# Altium PCB ARMBoard.PcbDoc
Units mm, origin at the board's own origin, x right, y up, seen from the top; angles counter-clockwise.
Board outline 70 x 50 mm, 2 copper layers (Top Layer, Bottom Layer), stack 0.571 mm thick; 64 components, 53 nets, 236 pads, 287 vias.
Unrouted connection lines stored in the file: 41.
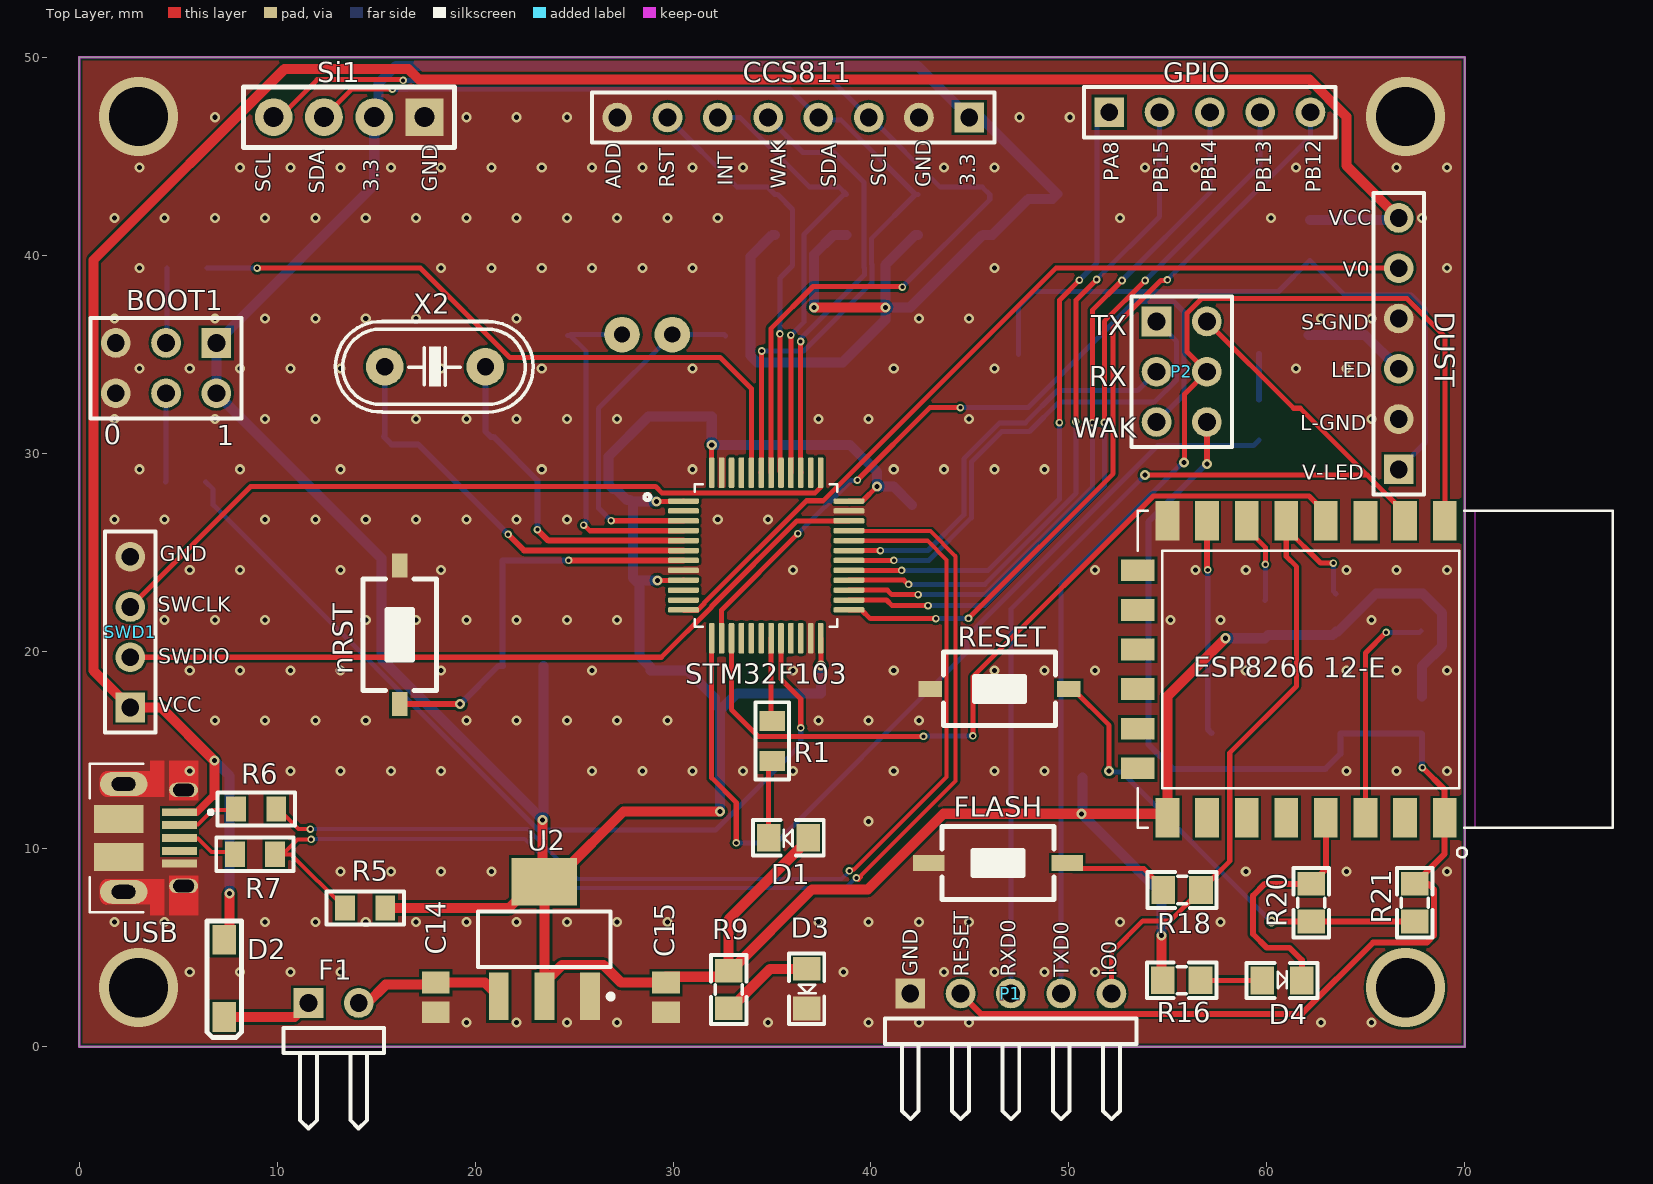
[diagram p0: Top Layer view]
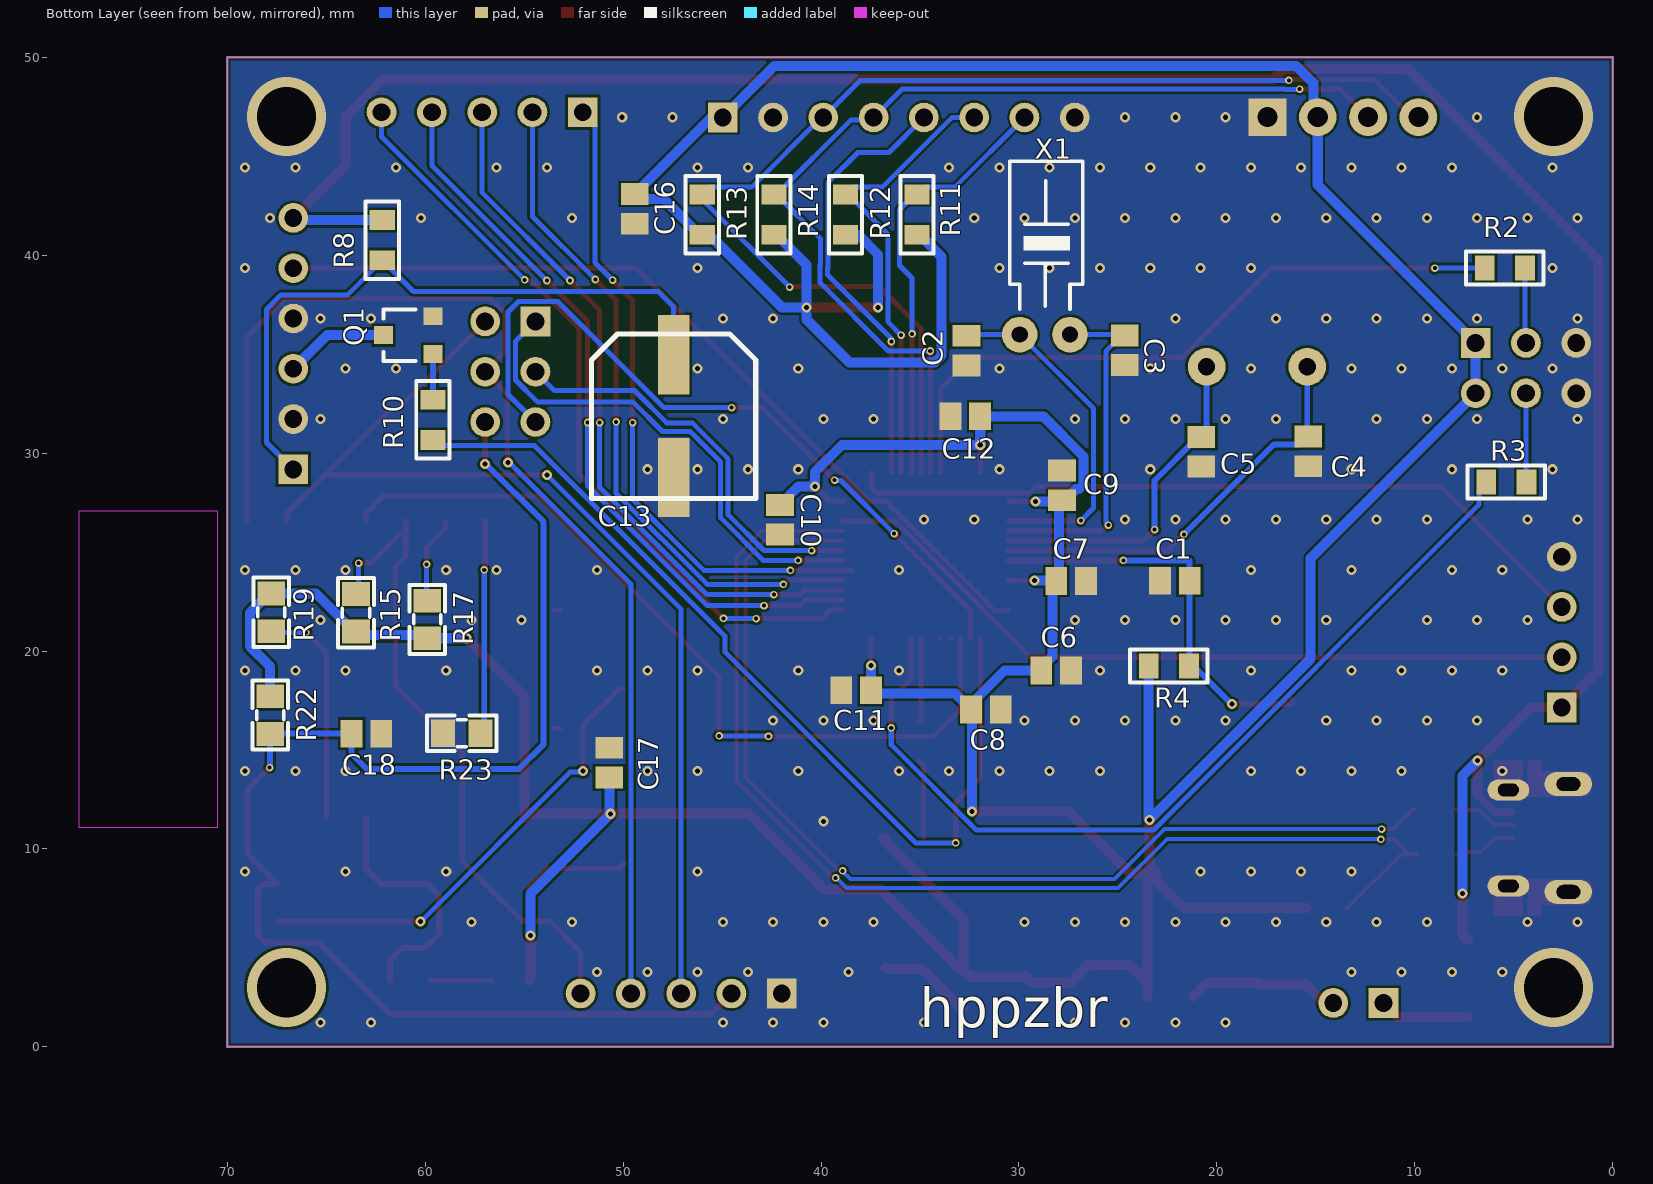
[diagram p1: Bottom Layer view, seen from below]
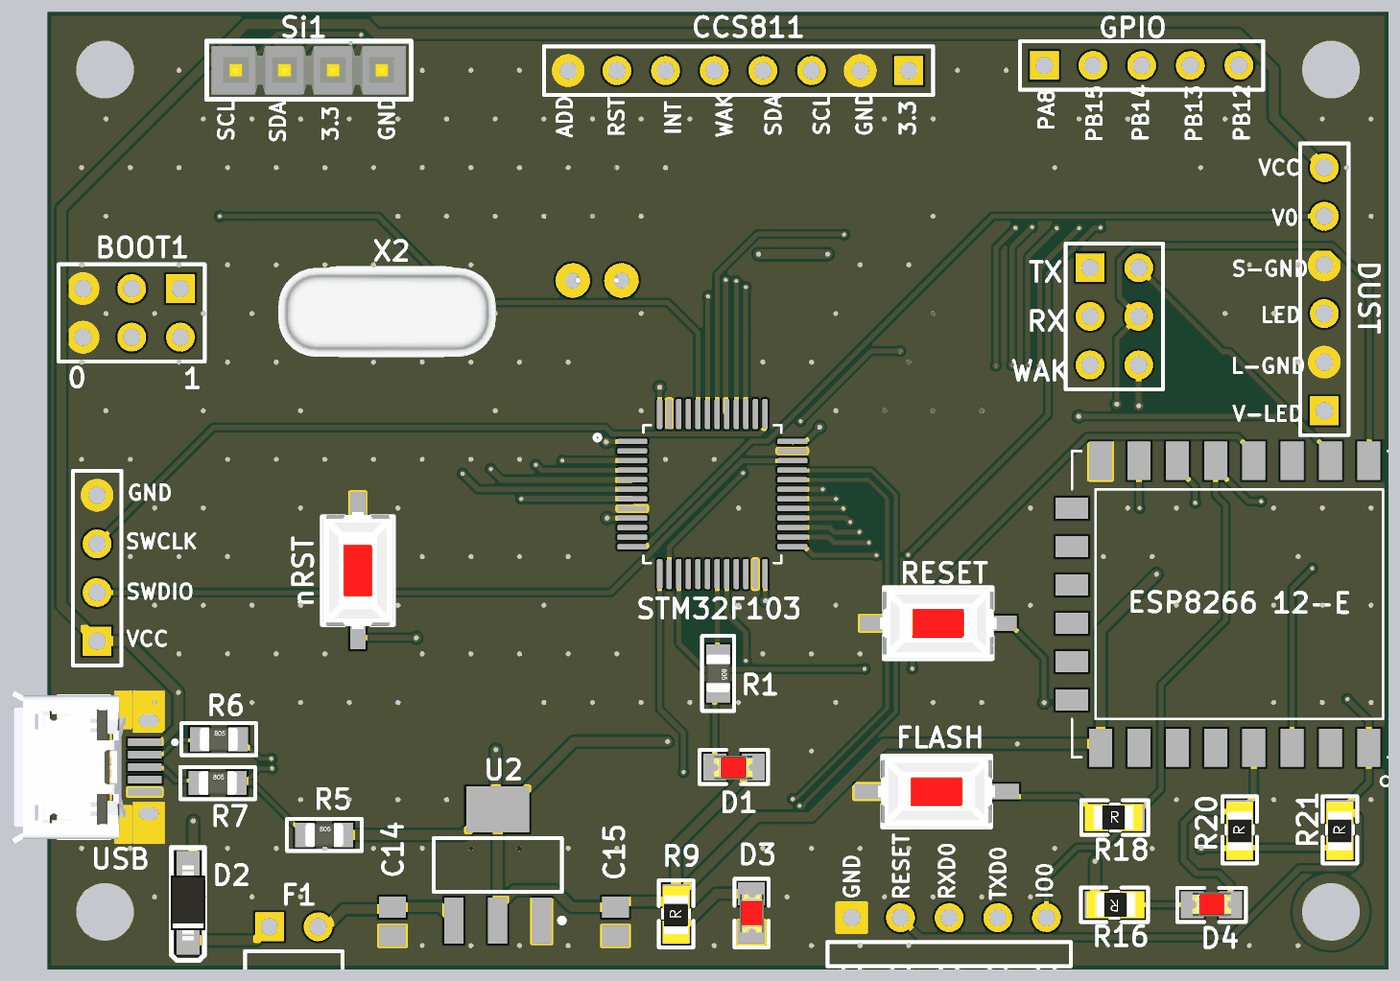
[diagram p2: 3D render of the assembled board from above, using the file's embedded part models]
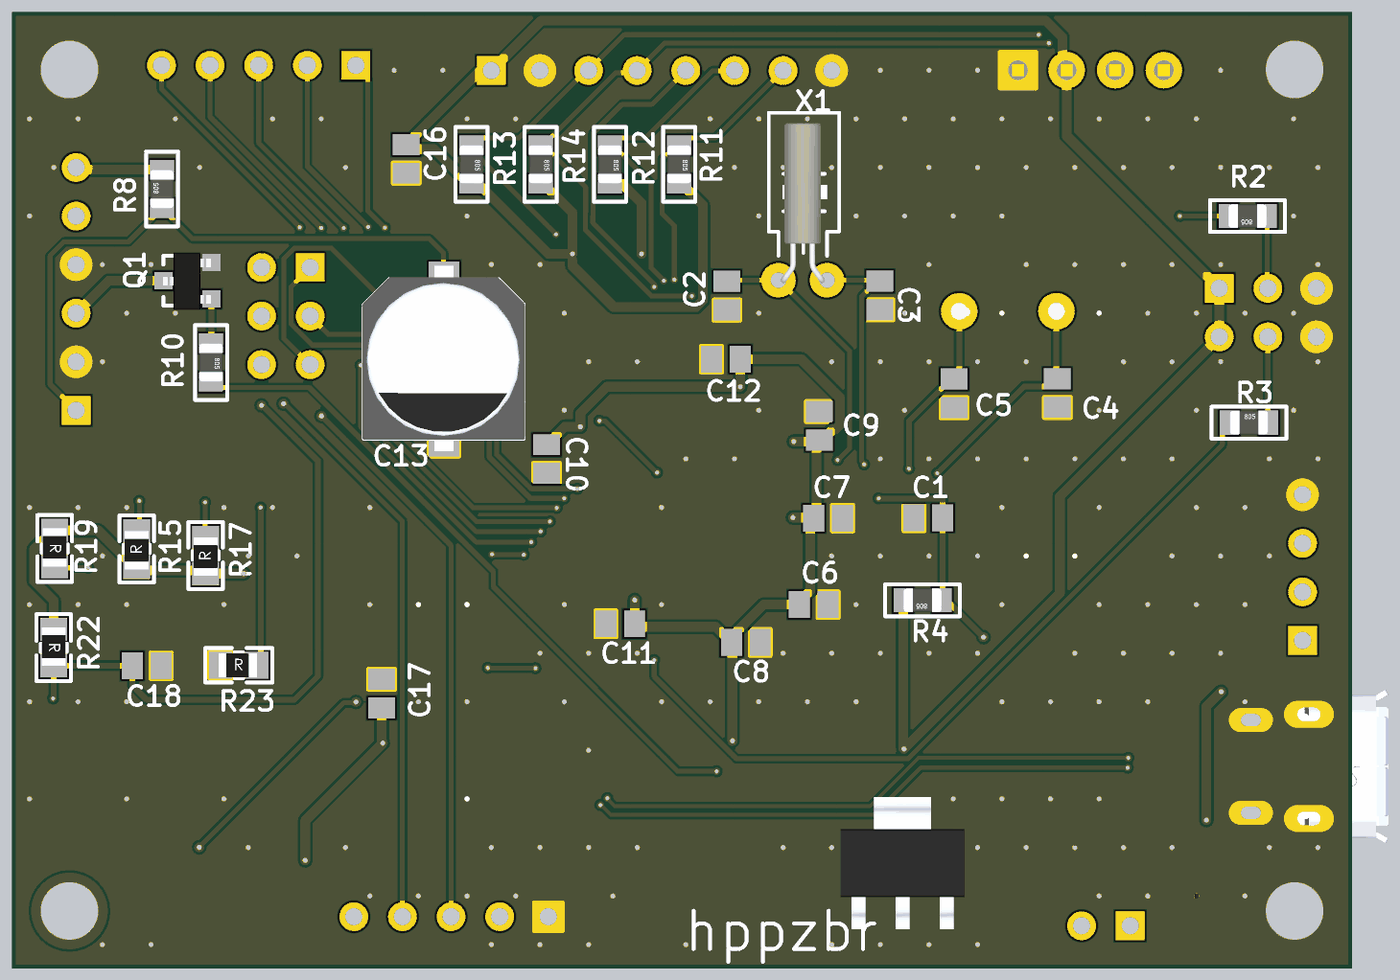
[diagram p3: 3D render of the assembled board from below, using the file's embedded part models]

## Layer stack, top to bottom
Top Solder: solder mask 0.0102, Solder Resist, Dk 3.5
Top Layer: signal copper 0.0356
Dielectric 1: dielectric 0.5, FR-4, Dk 4.8
Bottom Layer: signal copper 0.0356
Bottom Solder: solder mask 0.0102, Solder Resist, Dk 3.5

## Board outline
0,0 70,0 70,0.001 70,50 0,50 0,49.999 0,0

## Design rules (kind name [scope] priority, off if disabled: settings)
Clearance [All] p1: gap=0.127 ignorepadtopadclearanceinfootprint=FALSE
ComponentClearance [All] p1 off: gap=0.254 collisioncheckmode=3 verticalgap=0.254 showdistances=FALSE
DiffPairsRouting DiffPair_90DiffPairsRouting [InDifferentialPairClass('diff_class')] p1: maxlimit=0.254 minlimit=0.254 mostfreqgap=0.254 toplayer_minwidth=0.203 toplayer_maxwidth=0.203 toplayer_prefwidth=0.203 bottomlayer_minwidth=0.203 bottomlayer_maxwidth=0.203 bottomlayer_prefwidth=0.203 maxuncoupledlength=254
DiffPairsRouting [All] p2: maxlimit=0.254 minlimit=0.254 mostfreqgap=0.254 toplayer_minwidth=0.381 toplayer_maxwidth=0.381 toplayer_prefwidth=0.381 bottomlayer_minwidth=0.381 bottomlayer_maxwidth=0.381 bottomlayer_prefwidth=0.381 maxuncoupledlength=12.7
Height [All] p1 off: minheight=0 maxheight=25.4 prefheight=12.7
HoleSize [All] p1: absolutevalues=TRUE maxlimit=3.048 minlimit=0.025 maxpercent=80.000 minpercent=20.000
MatchedLengths DiffPair_90MatchedLengths [InDifferentialPairClass('diff_class')] p1: tolerance=25.4 checknetsindiffpair=FALSE checkdiffpairvsdiffpair=TRUE checkxsignals=TRUE checkothers=TRUE
MinimumSolderMaskSliver [All] p1: minsoldermaskwidth=0.076
PlaneClearance [All] p1: clearance=0.127
PlaneConnect [All] p1: planeconnectstyle=Direct reliefexpansion=0.508 reliefentries=4 reliefconductorwidth=0.254 reliefairgap=0.254
PolygonConnect [All] p1: connectstyle=Direct reliefconductorwidth=0.254 reliefentries=4 polygonreliefangle="90 Angle" airgapwidth=0.254
RoutingVias [All] p1: holewidth=0.254 width=0.254 viastyle="Through Hole" minholewidth=0.203 minwidth=0.203 maxholewidth=3.048 maxwidth=4.064
SilkToSilkClearance [IsText] p1: silktosilkclearance=0.254
SolderMaskExpansion [All] p1: expansion=0.102
Width [All] p1: maxlimit=1.27 minlimit=0.203 preferedwidth=0.254
22 further rules are at their usual default settings.

## Classes and differential pairs
differential pair class diff_class: D
differential pair D: +D_P -D_N

## Components (designator, comment, footprint, x,y, rotation, side; value= is the part's Value field where it differs from the comment)
BOOT1 "Header 3X2A" HDR2X3_CEN 6.935,35.559 r180 top
C1 "100n" C0805 22.129,23.556 r180 bottom value=33p
C2 "20p" C0805 32.652,35.173 r90 bottom value=33p
C3 "20p" C0805 24.663,35.19 r90 bottom value=33p
C4 "20p" C0805 15.391,30.082 r90 bottom value=33p
C5 "20p" C0805 20.793,30.066 r90 bottom value=33p
C6 "100n" C0805 28.121,19.018 r0 bottom value=33p
C7 "10n" C0805 27.366,23.541 r0 bottom value=33p
C8 "10u" C0805 31.667,17.042 r0 bottom value=33p
C9 "100n" C0805 27.825,28.368 r270 bottom value=33p
C10 "100n" C0805 42.076,26.63 r90 bottom value=33p
C11 "100n" C0805 38.231,18.012 r180 bottom value=33p
C12 "100n" C0805 32.714,31.852 r180 bottom value=33p
C13 "220uF" "tu nhom 8 (e)" 47.445,31.863 r270 bottom
C14 "10u" C0805 18.014,2.5 r90 top value=33p
C15 "10u" C0805 29.647,2.5 r90 top value=33p
C16 "1uF" C0805 49.407,42.331 r90 bottom value=33p
C17 "100u" C0805 50.692,14.364 r270 bottom value=33p
C18 "100n" C0805 62.959,15.828 r0 bottom value=33p
CCS811 "CCS811" HDR1X8 44.963,46.947 r180 top (schematic designator CCS1)
D1 "LED" "LED 0805" 35.836,10.52 r180 top
D2 "1N5819" SOD123 7.333,3.468 r270 top
D3 "LED" "LED 0805" 36.801,2.953 r270 top
D4 "LED" "LED 0805" 60.755,3.413 r0 top
DUST "GP2Y1010AUF" HDR1X6 66.653,29.175 r90 top (schematic designator GP1)
"ESP8266 12-E" "ESP8266-12E" XCVR_ESP8266-12E/ESP-12E 61.975,19.075 r90 top locked (schematic designator U3)
F1 "Fused" HDR1X2H 11.585,2.225 r0 top
FLASH "S3" SW-SMD#1 46.414,9.292 r180 top (schematic designator FLASH1)
GPIO "GPIO" HDR1X5 52.035,47.216 r0 top (schematic designator GPIO1)
nRST "SW-SMD" SW-SMD#2 16.2,20.825 r90 top (schematic designator S1)
P1 "Program" HDR1X5H 41.985,2.7 r0 top
P2 "UART" HDR2X3 54.425,36.647 r270 top locked
Q1 "NPN" SOT23-231 60.845,35.954 r90 bottom value=C1815
R1 "R0805" "DIEN TRO 0805" 35.012,15.455 r90 top value=330
R2 "R0805" "DIEN TRO 0805" 5.456,39.34 r180 bottom value=10K
R3 "R0805" "DIEN TRO 0805" 5.383,28.538 r0 bottom value=10K
R4 "10k" "DIEN TRO 0805" 22.432,19.249 r180 bottom value=0805
R5 "1.5k" "DIEN TRO 0805" 14.447,7.016 r180 top value=0805
R6 "22R" "DIEN TRO 0805" 8.948,12.015 r180 top value=0805
R7 "22R" "DIEN TRO 0805" 8.885,9.732 r180 top value=0805
R8 "R0805" "DIEN TRO 0805" 62.164,40.752 r270 bottom value=150
R9 "470" "tro smd 0805" 32.75,2.9 r90 top
R10 "R0805" "DIEN TRO 0805" 59.605,31.677 r90 bottom value=10k
R11 "R0805" "DIEN TRO 0805" 35.15,42.039 r90 bottom value=4.7k
R12 "R0805" "DIEN TRO 0805" 38.766,42.039 r90 bottom value=4.7k
R13 "R0805" "DIEN TRO 0805" 45.998,42.039 r90 bottom value=4.7k
R14 "R0805" "DIEN TRO 0805" 42.382,42.039 r90 bottom value=4.7k
R15 "10K" "tro smd 0805" 63.549,21.927 r90 bottom
R16 "470" "tro smd 0805" 55.692,3.305 r180 top
R17 "10K" "tro smd 0805" 59.951,21.59 r90 bottom
R18 "470" "tro smd 0805" 55.712,7.989 r0 top
R19 "10K" "tro smd 0805" 67.709,21.955 r270 bottom
R20 "0" "tro smd 0805" 62.172,7.288 r90 top
R21 "470" "tro smd 0805" 67.402,7.288 r90 top
R22 "10K" "tro smd 0805" 67.761,16.765 r270 bottom
R23 "10K" "tro smd 0805" 58.152,15.912 r180 bottom
RESET "RESET" SW-SMD#2 46.492,18.084 r180 top (schematic designator S2)
Si1 "Si7021" "Header 4" 17.448,46.965 r180 top
STM32F103 "STM32F103C8T6" QFP50P900X900X160-48N 34.705,24.825 r0 top locked (schematic designator U1)
SWD1 "SWD" HDR1X4 2.585,17.145 r90 top
U2 "AMS1117-3.3" SOT-223 23.502,5.45 r180 top
USB "10103594-0001LF" AMPHENOL_10103594-0001LF 2.251,10.557 r270 top locked (schematic designator J1)
X1 "32,768 Khz" XT32k 29.963,35.982 r90 bottom value=32,768khz
X2 "8Mhz" XT2 17.98,34.358 r0 top value=4Mhz

## Footprints (in the part's own frame and the unit in brackets; to place one, negate y for a bottom-side part, rotate by r counter-clockwise, add the part's x,y. Pads: shape width x height; smd on the part's side, far side on the other; paste and mask are expansions set on the pad)
AMPHENOL_10103594-0001LF [mm]
  rect 0.4x1.75 smd: 1(-1.3,2.825) 2(-0.65,2.825) 3(0,2.825) 4(0.65,2.825) 5(1.3,2.825)
  oval 0.73x1.46 hole 0.65 slot 1.05 at 90 deg mask+0: 6(-2.425,3.03) 7(2.425,3.03)
  oval 1.2x2.4 hole 0.7 slot 1.2 at 90 deg: 8(-2.725,0) 9(2.725,0)
  oval 1.05x2.1 smd far side paste-2: 10(-2.425,3.03) 11(2.425,3.03)
  rect 1.425x2.5 smd: S1(-0.962,-0.25) S2(0.962,-0.25)
  Top Layer region: 3.9,1.35 3.375,1.35 3.375,-0.8 3.374,-0.821 3.373,-0.842 3.37,-0.863 3.366,-0.883 3.361,-0.904 3.355,-0.924 3.348,-0.943 3.34,-0.963 3.331,-0.982 3.321,-1 3.31,-1.018 3.299,-1.035 3.286,-1.052 3.272,-1.068 3.258,-1.083 3.243,-1.097 3.227,-1.111 3.21,-1.124 3.193,-1.135 3.175,-1.146 3.157,-1.156 3.138,-1.165 3.118,-1.173 3.099,-1.18 3.079,-1.186 3.058,-1.191 3.038,-1.195 3.017,-1.198 2.996,-1.199 2.975,-1.2 2.475,-1.2 2.454,-1.199 2.433,-1.198 2.412,-1.195 2.392,-1.191 2.371,-1.186 2.351,-1.18 2.332,-1.173 2.312,-1.165 2.293,-1.156 2.275,-1.146 2.257,-1.135 2.24,-1.124 2.223,-1.111 2.207,-1.097 2.192,-1.083 2.178,-1.068 2.164,-1.052 2.151,-1.035 2.14,-1.018 2.129,-1 2.119,-0.982 2.11,-0.963 2.102,-0.943 2.095,-0.924 2.089,-0.904 2.084,-0.883 2.08,-0.863 2.077,-0.842 2.076,-0.821 2.075,-0.8 2.075,2.05 3.9,2.05
  Top Layer region: -2.075,-0.8 -2.076,-0.821 -2.077,-0.842 -2.08,-0.863 -2.084,-0.883 -2.089,-0.904 -2.095,-0.924 -2.102,-0.943 -2.11,-0.963 -2.119,-0.982 -2.129,-1 -2.14,-1.018 -2.151,-1.035 -2.164,-1.052 -2.178,-1.068 -2.192,-1.083 -2.207,-1.097 -2.223,-1.111 -2.24,-1.124 -2.257,-1.135 -2.275,-1.146 -2.293,-1.156 -2.312,-1.165 -2.332,-1.173 -2.351,-1.18 -2.371,-1.186 -2.392,-1.191 -2.412,-1.195 -2.433,-1.198 -2.454,-1.199 -2.475,-1.2 -2.975,-1.2 -2.996,-1.199 -3.017,-1.198 -3.038,-1.195 -3.058,-1.191 -3.079,-1.186 -3.099,-1.18 -3.118,-1.173 -3.138,-1.165 -3.157,-1.156 -3.175,-1.146 -3.193,-1.135 -3.21,-1.124 -3.227,-1.111 -3.243,-1.097 -3.258,-1.083 -3.272,-1.068 -3.286,-1.052 -3.299,-1.035 -3.31,-1.018 -3.321,-1 -3.331,-0.982 -3.34,-0.963 -3.348,-0.943 -3.355,-0.924 -3.361,-0.904 -3.366,-0.883 -3.37,-0.863 -3.373,-0.842 -3.374,-0.821 -3.375,-0.8 -3.375,1.35 -3.9,1.35 -3.9,2.05 -2.075,2.05
  Top Layer region: 3.9,2.3 1.9,2.3 1.9,3.76 3.9,3.76
  Top Layer region: -1.9,2.3 -3.9,2.3 -3.9,3.76 -1.9,3.76
  silkscreen extent -3.75,-1.7 3.75,4.5, body extent -4.02,-4.15 4.02,1.88, height 3.13
C0805 [mm] "Chip Capacitor, Body 2.0x1.3mm, IPC High Density"
  rect 1.1x1.4 smd: 1(-0.75,0) 2(0.75,0)
  body extent -1.1,-0.72 1.1,0.72, height 1.4
"DIEN TRO 0805" [mm] "Chip Resistor; Body 2.0 x 1.3 mm (LxW typ)"
  rect 1x1.27 smd: 1(-1.016,0) 2(1.016,0)
  silkscreen extent -1.96,-0.84 1.96,0.84, body extent -1,-0.62 1,0.63, height 0.78
HDR1X2H [mm] "Connector; Header; 2 Position; Right Angle"
  rect 1.5x1.5 hole 0.9: 1(0,0)
  round 1.5 hole 0.9: 2(2.54,0)
  silkscreen extent -1.27,-6.35 3.81,-1.27
HDR1X4 [mm] "Connector; Header; 4 Position"
  rect 1.5x1.5 hole 0.9: 1(0,0)
  round 1.5 hole 0.9: 2(2.54,0) 3(5.08,0) 4(7.62,0)
  silkscreen extent -1.27,-1.27 8.89,1.27
HDR1X5 [mm] "Connector; Header; 5 Position"
  rect 1.5x1.5 hole 0.9: 1(0,0)
  round 1.5 hole 0.9: 2(2.54,0) 3(5.08,0) 4(7.62,0) 5(10.16,0)
  silkscreen extent -1.27,-1.27 11.43,1.27
HDR1X5H [mm] "Connector; Header; 5 Position; Right Angle"
  rect 1.5x1.5 hole 0.9: 1(0,0)
  round 1.5 hole 0.9: 2(2.54,0) 3(5.08,0) 4(7.62,0) 5(10.16,0)
  silkscreen extent -1.27,-6.35 11.43,-1.27
HDR1X6 [mm] "Connector; Header; 6 Position"
  rect 1.5x1.5 hole 0.9: 1(0,0)
  round 1.5 hole 0.9: 2(2.54,0) 3(5.08,0) 4(7.62,0) 5(10.16,0) 6(12.7,0)
  silkscreen extent -1.27,-1.27 13.97,1.27
HDR1X8 [mm] "Connector; Header; 8 Position"
  rect 1.5x1.5 hole 0.9: 1(0,0)
  round 1.5 hole 0.9: 2(2.54,0) 3(5.08,0) 4(7.62,0) 5(10.16,0) 6(12.7,0) 7(15.24,0) 8(17.78,0)
  silkscreen extent -1.27,-1.27 19.05,1.27
HDR2X3 [mm] "Connector; Header; 3x2 Position"
  rect 1.5x1.5 hole 0.9: 1(0,0)
  round 1.5 hole 0.9: 2(0,2.54) 3(2.54,0) 4(2.54,2.54) 5(5.08,0) 6(5.08,2.54)
  silkscreen extent -1.27,-1.27 6.35,3.81
HDR2X3_CEN [mm] "Connector; Header; 3x2 Position"
  rect 1.5x1.5 hole 0.9: 1(0,0)
  round 1.5 hole 0.9: 2(2.54,0) 3(5.08,0) 4(0,2.54) 5(2.54,2.54) 6(5.08,2.54)
  silkscreen extent -1.27,-1.27 6.35,3.81
"Header 4" [mil] "Connector; Header; 4 Position; Solder Pad 35mil"
  rect 75x75 hole 40: 1(0,0)
  round 75 hole 40: 2(100,0) 3(200,0) 4(300,0)
  silkscreen extent -60,-60 360,60, body extent -50,-50 350,50, height 330
"LED 0805" [mm]
  rect 1.2x1.4 smd: 1(-0.996,-0.051) 2(1.004,-0.051)
  silkscreen extent -1.78,-0.94 1.8,0.84, body extent -0.98,-0.65 1.04,0.6, height 1.1
QFP50P900X900X160-48N [mm]
  rrect50% 1.56x0.28 smd: 1(-4.18,2.75) 2(-4.18,2.25) 3(-4.18,1.75) 4(-4.18,1.25) 5(-4.18,0.75) 6(-4.18,0.25) 7(-4.18,-0.25) 8(-4.18,-0.75) 9(-4.18,-1.25) 10(-4.18,-1.75) 11(-4.18,-2.25) 12(-4.18,-2.75) 25(4.18,-2.75) 26(4.18,-2.25) 27(4.18,-1.75) 28(4.18,-1.25) 29(4.18,-0.75) 30(4.18,-0.25) 31(4.18,0.25) 32(4.18,0.75) 33(4.18,1.25) 34(4.18,1.75) 35(4.18,2.25) 36(4.18,2.75)
  rrect50% 0.28x1.56 smd: 13(-2.75,-4.18) 14(-2.25,-4.18) 15(-1.75,-4.18) 16(-1.25,-4.18) 17(-0.75,-4.18) 18(-0.25,-4.18) 19(0.25,-4.18) 20(0.75,-4.18) 21(1.25,-4.18) 22(1.75,-4.18) 23(2.25,-4.18) 24(2.75,-4.18) 37(2.75,4.18) 38(2.25,4.18) 39(1.75,4.18) 40(1.25,4.18) 41(0.75,4.18) 42(0.25,4.18) 43(-0.25,4.18) 44(-0.75,4.18) 45(-1.25,4.18) 46(-1.75,4.18) 47(-2.25,4.18) 48(-2.75,4.18)
  silkscreen extent -6.15,-3.6 3.6,3.6
SOD123 [mm]
  rect 1.5x1.2 smd: 1(-1.95,0) 2(1.95,0)
  silkscreen extent -2.9,-0.86 3,0.86, body extent -1.95,-0.9 1.95,0.9, height 1.18
SOT23-231 [mm]
  rect 0.9x0.95 smd mask+0: 1(0.95,-1.25)
  rect 0.9x0.95 smd: 2(-0.95,-1.25) 3(0,1.25)
  silkscreen extent -1.3,-0.38 1.3,1.25, body extent -1.52,-1.23 1.48,1.27, height 1.06
SOT-223 [mm] "SOT223, 4-Leads, Body 6.5x3.5mm, Pitch 2.3mm, Lead Span 7mm, IPC Medium Density"
  rect 1x2.4 smd: 1(-2.3,2.9) 2(0,2.9) 3(2.3,2.9)
  rect 3.3x2.4 smd: 2(0,-2.9)
  silkscreen extent -3.48,-1.4 3.35,3.02, body extent -3.23,-3.5 3.27,3.39
SW-SMD#1 [mm] "Switch SMD type"
  rect 1.6x0.8 smd: 1(-3.5,0) 2(3.5,0)
  silkscreen extent -2.82,-1.85 2.82,1.85, body extent -3.05,-1.85 3.05,1.85, height 2.5
SW-SMD#2 [mm] "Switch SMD type"
  rect 1.2x0.8 smd: 1(-3.5,0) 2(3.5,0)
  silkscreen extent -2.82,-1.85 2.82,1.85, body extent -3.05,-1.85 3.05,1.85, height 2.5
"tro smd 0805" [mm]
  rect 1.2x1.4 smd: 1(-0.946,-0.061) 2(0.954,-0.061)
  silkscreen extent -1.75,-0.97 1.75,0.84, body extent -1.56,-0.76 1.44,0.64, height 0.53
"tu nhom 8 (e)" [mm]
  rect 4x1.6 smd: 1(-3.1,0) 2(3.1,0)
  silkscreen extent -4.15,-4.15 4.15,4.15, body extent -4.88,-4.25 4.82,4.25, height 10.5
XCVR_ESP8266-12E/ESP-12E [mm]
  rect 2x1.2 smd: 1(-7.5,-7) 2(-7.5,-5) 3(-7.5,-3) 4(-7.5,-1) 5(-7.5,1) 6(-7.5,3) 7(-7.5,5) 8(-7.5,7) 15(7.5,7) 16(7.5,5) 17(7.5,3) 18(7.5,1) 19(7.5,-1) 20(7.5,-3) 21(7.5,-5) 22(7.5,-7)
  rect 1.1x1.7 smd: 9(-5,8.5) 10(-3,8.5) 11(-1,8.5) 12(1,8.5) 13(3,8.5) 14(5,8.5)
  Keep-Out Layer region: 8,-8.51 -8.009,-8.51 -8.009,-15.5 8,-15.5
  Keep-Out Layer region: 8,-8.51 -8.009,-8.51 -8.009,-15.5 8,-15.5
  silkscreen extent -9.5,-15.5 8,8.5
XT2 [mil] "Footpin for Crystal 2 pin"
  round 75 hole 34: 1(-100,0) 2(100,0)
  silkscreen extent -198,-90 195,90, body extent -233,-93 213,90, height 138
XT32k [mm]
  round 1.8 hole 0.813: 1(0,0) 2(0,-2.54)
  silkscreen extent 1.27,-3.18 8.76,0.51, body extent -0.15,-2.42 8.2,-0.12, height 1.95

## Part data
BOOT1: "Header, 3-Pin, Dual row", LatestRevisionDate=17-Jul-2002, LatestRevisionNote="Re-released for DXP Platform.", Publisher="Altium Limited"
C1 C2 C3 C4 C5 C6 C7 C8 C9 C10 C11 C12 C14 C15 C16: library part CapSMD, "Capacitor", LatestRevisionDate=17-Jul-2002, LatestRevisionNote="Re-released for DXP Platform.", PackageReference=RAD-0.3, Published=8-Jun-2000, Publisher="Altium Limited"
C13: library part "Tu Nhom 220uF 10V", "Dán", Chung_Loai=Dán, Don_Vi=Con, Ma_Hang=MH004021, So_Chan=2, Ten_Linh_Kien="T? Nhôm 220uF 10V"
C17: library part CapSMD, "100n", LatestRevisionDate=17-Jul-2002, LatestRevisionNote="Re-released for DXP Platform.", PackageReference=RAD-0.3, Published=8-Jun-2000, Publisher="Altium Limited"
C18: library part CapSMD, LatestRevisionDate=17-Jul-2002, LatestRevisionNote="Re-released for DXP Platform.", PackageReference=RAD-0.3, Published=8-Jun-2000, Publisher="Altium Limited"
CCS811: library part "Header 8", "Header, 8-Pin", LatestRevisionDate=17-Jul-2002, LatestRevisionNote="Re-released for DXP Platform.", Publisher="Altium Limited"
D2: library part "Diode Schottky"
DUST: library part "Header 6", "Header, 6-Pin", LatestRevisionDate=17-Jul-2002, LatestRevisionNote="Re-released for DXP Platform.", Publisher="Altium Limited"
"ESP8266 12-E": library part ESP8266-12E/ESP-12E, "This WiFi module has a 32-bit MCU micro and clock speeds supporting 80 MHz or 160 MHz. Supports the RTOS and integrated Wi-Fi MAC/BB/RF/PA/LNA, and has an on-board antenna.", Package=None, Availability=Unavailable, MF=AI-Thinker, MP=ESP8266-12E/ESP-12E, Price=None, SnapEDA_Link=https://www.snapeda.com/parts/ESP8266-12E/ESP-12E/AI-Thinker/view-part/106414/?ref=snap
F1: library part FuseNote2
FLASH RESET: library part SW-SMD, "Switch", LatestRevisionDate=17-Jul-2002, LatestRevisionNote="Re-released for DXP Platform.", PackageReference=SPST-2, Published=24-Mar-1999, Publisher="Altium Limited"
GPIO: library part "Header 5", "Header, 5-Pin", LatestRevisionDate=17-Jul-2002, LatestRevisionNote="Re-released for DXP Platform.", Publisher="Altium Limited"
nRST: "Switch", LatestRevisionDate=17-Jul-2002, LatestRevisionNote="Re-released for DXP Platform.", PackageReference=SPST-2, Published=24-Mar-1999, Publisher="Altium Limited"
P1: library part "Header 5H", "Header, 5-Pin, Right Angle", LatestRevisionDate=17-Jul-2002, LatestRevisionNote="Re-released for DXP Platform.", Publisher="Altium Limited"
P2: library part "Header 3X2", "Header, 3-Pin, Dual row", LatestRevisionDate=17-Jul-2002, LatestRevisionNote="Re-released for DXP Platform.", Publisher="Altium Limited"
Q1: library part 2N222, "NPN 600mW, ECB", =C2383
R1 R2 R3 R8 R10 R11 R12 R13 R14: "Resistor SMD 0805", LatestRevisionDate=17-Jul-2002, LatestRevisionNote="Re-released for DXP Platform.", PackageReference=AXIAL-0.4, Published=8-Jun-2000, Publisher="Altium Limited"
R4 R5 R6 R7: library part R0805, "Resistor SMD 0805", LatestRevisionDate=17-Jul-2002, LatestRevisionNote="Re-released for DXP Platform.", PackageReference=AXIAL-0.4, Published=8-Jun-2000, Publisher="Altium Limited"
R9 R15 R16 R17 R18 R19 R20 R21 R22 R23: library part "Tro 0805 1% 82k", "Dán", Chung_Loai=Dán, Don_Vi=Con, Ma_Hang=MH005482, So_Chan=2, Ten_Linh_Kien="Tr? 0805 1% 82k"
Si1 SWD1: library part "Header 4", "Header, 4-Pin", LatestRevisionDate=17-Jul-2002, LatestRevisionNote="Re-released for DXP Platform.", Publisher="Altium Limited"
STM32F103: "ARM® Cortex®-M3 STM32F1 Microcontroller IC 32-Bit 72MHz 64KB _64K x 8_ FLASH", Package="LQFP-48 STMicroelectronics", Availability=Unavailable, MF=STMicroelectronics, MP=STM32F103C8T6, Price=None, SnapEDA_Link=https://www.snapeda.com/parts/STM32F103C8T6/STMicroelectronics/view-part/52195/?ref=snap
U2: "Sot223/Pkg 1-Amp 3.3-Volt Low Drop Out Voltage Regulatator", Package=None, Availability=Unavailable, MF="Advanced Monolithic Systems", MP=AMS1117-3.3, Price=None, SnapEDA_Link=https://www.snapeda.com/parts/AMS1117-3.3/Advanced%20Monolithic%20Systems/view-part/53450/?ref=snap
USB: "USB - micro B USB 2.0 Receptacle Connector 5 Position Surface Mount, Right Angle; Through Hole", Package=None, Availability=Good, Check_prices=https://www.snapeda.com/parts/10103594-0001LF/Amphenol%20FCI/view-part/5161044/?ref=eda, MF="Amphenol ICC (FCI)", MP=10103594-0001LF, Price=None, Purchase-URL=https://pricing.snapeda.com/search/part/10103594-0001LF/?ref=eda, SnapEDA_Link=https://www.snapeda.com/parts/10103594-0001LF/Amphenol%20FCI/view-part/5161044/?ref=snap
X1: library part XT32k, "Crystal 32,768kHz for timer real"
X2: library part XT2, "Crystal For all Crystal 2pin."

## Via types
v1: diameter 0.508, hole 0.254, Top Layer to Bottom Layer, tented both sides, 237 vias
v2: diameter 0.381, hole 0.203, Top Layer to Bottom Layer, tented both sides, 46 vias
v3: diameter 4, hole 3, Top Layer to Bottom Layer, 4 vias

## Nets (pads, with @x,y where several pads share a name; then routed paths per layer and width w, separated by ;. In a path a pad name is that pad's centre, name@x,y a point inside that pad or via, vN(x,y) a via of type N, cw(c..) or ccw(c..) an arc to the next point about the centre after c; other vN are vias at no path point)
3.3V: "ESP8266 12-E.8" BOOT1.1 BOOT1.4 C6.2 C7.2 C8.2 C9.2 C10.2 C11.2 C12.2 C15.2 C16.2 C17.2 CCS811.1 D1.1 R4.1 R5.1 R9.2 R11.1 R12.1 R13.1 R14.1 R15.1 R16.2 R17.1 R19.1 R22.1 Si1.2 STM32F103.1 STM32F103.9 STM32F103.24 STM32F103.36 STM32F103.48 U2.2 | length 300.1
  Top Layer w0.254: v1(29.161,27.548) 29.176,27.562 30.499,27.562 STM32F103.1@30.525,27.588 ; v1(29.207,23.57) 29.21,23.573 30.523,23.573 STM32F103.9 ; STM32F103.48@31.942,29.005 31.956,29.019 v1@31.956,30.407 ; v1@37.455,19.275 37.463,19.283 37.463,20.637 STM32F103.24 ; STM32F103.36@38.908,27.552 STM32F103.36 39.566,27.575 v1(40.31,28.319)
  Top Layer w0.508: R5.1 21.718,7.016 23.052,8.35 U2.2@23.052,8.775 ; v1(23.406,11.472) 23.406,9.129 U2.2@23.052,8.775 ; U2.2@23.502,2.55 U2.2@23.502,3.25 ; v1(32.368,11.893) 27.495,11.893 24.377,8.775 U2.2@23.502,8.775 ; D1.1 36.831,10.47 32.811,6.45 R9.2 ; v1(37.118,37.358) v1(40.726,37.359) ; v1@37.455,19.275 v1(37.471,19.259) ; v1(54.684,5.642) 54.684,3.42 R16.2 ; v1(57.902,20.644) 54.975,17.717 54.975,11.575 54.771,11.779 v1(50.632,11.779) 43.662,11.779 39.84,7.957 37.013,7.957 32.911,3.854 R9.2 ; U2.2@23.052,8.775 U2.2@23.502,8.775 ; U2.2@23.502,3.25 23.502,8.35 U2.2@23.502,8.775 ; U2.2@23.502,3.25 24.383,4.131 26.499,4.131 27.38,3.25 29.351,3.25 29.647,3.546 32.502,3.546 R9.2
  Bottom Layer w0.508: R4.1 23.448,11.514 v1(23.406,11.472) 15.265,19.612 15.265,24.689 BOOT1.4 BOOT1.1 14.908,43.533 Si1.2 15.127,47.184 15.127,48.68 16.003,49.555 42.355,49.555 CCS811.1 45.541,46.947 C16.2 49.161,42.835 47.945,42.835 46.133,41.023 R13.1 45.651,41.023 41.987,37.359 v1(40.726,37.359) 40.726,39.502 42.247,41.023 R14.1 ; v1(29.161,27.548) C9.2@27.896,27.548 ; v1(29.207,23.57) 28.145,23.57 C7.2 ; v1(32.368,11.893) 32.368,16.993 C8.2 ; R11.1 35.015,41.023 33.911,39.918 33.911,34.916 34.245,34.581 38.575,34.581 40.726,36.733 40.726,37.01 ; v1(37.118,37.358) 37.118,40.025 38.116,41.023 R12.1 ; v1(37.471,19.259) 37.471,18.022 C11.2 37.481,17.862 33.237,17.862 C8.2 ; C10.2 41.137,28.319 v1(40.31,28.319) 40.31,29.037 38.939,30.408 v1(31.957,30.408) 31.957,31.845 C12.2 28.77,31.852 26.744,29.826 26.744,28.411 26.967,28.187 27.106,28.187 27.675,27.618 C9.2 C9.2@27.896,27.548 ; C17.2 50.692,11.84 v1(50.632,11.779) 54.684,7.727 v1(54.684,5.642) ; v1(57.902,20.644) R17.1 60.059,20.813 63.319,20.813 R15.1 63.588,20.981 65.507,22.901 R19.1 67.87,22.901 68.851,21.92 68.851,20.243 67.822,19.214 R22.1 ; C9.2@27.896,27.548 27.971,27.473 27.971,23.686 C7.2 ; C7.2 28.302,23.355 28.302,19.737 28.871,19.168 C6.2 30.73,19.018 32.121,17.627 32.121,17.338 C8.2
BOOT0: R2.1 STM32F103.44 | length 34.3
  Top Layer w0.254: v2(8.994,39.34) 17.244,39.34 21.756,34.828 32.382,34.828 33.955,33.255 STM32F103.44
  Bottom Layer w0.254: R2.1 v2(8.994,39.34)
BOOT1: R3.2 STM32F103.20 | length 45.4
  Top Layer w0.254: STM32F103.20 35.455,18.578 36.452,17.581 v2(36.452,16.12)
  Bottom Layer w0.254: R3.2 6.772,28.165 6.772,27.387 23.195,10.964 32.157,10.964 36.452,15.259 v2(36.452,16.12)
D_N: R6.1 STM32F103.32 | length 53.8
  Top Layer w0.203: R6.1 10.081,12.015 11.09,11.006 11.093,11.009 11.098,11.004 v2(11.684,11.004) ; STM32F103.32 38.89,25.57 42.848,25.57 43.821,24.597 43.821,13.628 39.15,8.957 39.088,8.957 39.062,8.931 38.936,8.931 v2(38.902,8.897)
  Bottom Layer w0.203: v2(11.684,11.004) 11.689,11.009 22.647,11.009 25.178,8.478 38.519,8.478 38.902,8.861 v2(38.902,8.897)
D_P: R5.2 R7.1 STM32F103.33 | length 59.5
  Top Layer w0.203: R7.1 R7.1@10.281,9.732 ; v2(11.72,10.49) 11.039,10.49 R7.1@10.281,9.732 ; R5.2 10.716,9.732 R7.1@10.281,9.732 ; STM32F103.33 38.906,26.054 43.01,26.054 44.278,24.786 44.278,21.859 44.278,13.439 39.495,8.655 39.495,8.575 v2@39.359,8.44
  Bottom Layer w0.203: v2(11.72,10.49) 11.728,10.498 22.511,10.498 24.989,8.02 38.708,8.02 v2@39.226,8.537
  other v2: 39.262,8.537
Dust: DUST.5 STM32F103.12 | length 43.3
  Top Layer w0.254: STM32F103.12 30.542,22.058 31.246,22.058 31.559,22.371 31.559,22.41 36.739,27.59 37.588,27.59 49.333,39.335 DUST.5
EN: "ESP8266 12-E.3" R19.2 | length 11.6
  Top Layer w0.254: 64.975,11.575 64.975,19.902 v2(66.017,20.944)
  Bottom Layer w0.254: v2(66.017,20.944) 67.713,20.944 R19.2
GND: "ESP8266 12-E.15" BOOT1.3 BOOT1.6 C1.1 C2.1 C3.1 C4.1 C5.1 C6.1 C7.1 C8.1 C9.1 C10.1 C11.1 C12.1 C13.2 C14.1 C15.1 C16.1 C17.1 C18.1 CCS811.2 CCS811.8 D3.2 DUST.2 DUST.4 FLASH.2 nRST.2 P1.1 Q1.1 R23.1 RESET.2 Si1.1 STM32F103.8 STM32F103.23 STM32F103.35 STM32F103.47 SWD1.4 U2.1 USB.5 USB.6 USB.7 USB.8 USB.9 USB.10 USB.11 USB.S1 USB.S2
  other v1: 19.56,1.24 22.1,1.24 24.64,1.24 27.18,1.24 34.8,1.24 39.88,1.24 42.42,1.24 44.96,1.24 62.74,1.24 65.28,1.24 5.59,3.78 8.13,3.78 10.67,3.78 13.21,3.78 38.61,3.78 43.69,3.78 46.23,3.78 48.77,3.78 51.31,3.78 1.78,6.32 4.32,6.32 9.4,6.32 11.94,6.32 14.48,6.32 17.02,6.32 19.56,6.32 22.1,6.32 24.64,6.32 27.18,6.32 29.72,6.32 37.34,6.32 39.88,6.32 42.42,6.32 44.96,6.32 52.58,6.32 57.66,6.32 13.21,8.86 15.75,8.86 18.29,8.86 20.83,8.86 46.23,8.86 58.93,8.86 64.01,8.86 69.09,8.86 39.88,11.4 5.59,13.94 10.67,13.94 13.21,13.94 15.75,13.94 18.29,13.94 25.91,13.94 28.45,13.94 30.99,13.94 33.53,13.94 36.07,13.94 41.15,13.94 46.23,13.94 48.77,13.94 64.01,13.94 66.55,13.94 69.09,13.94 6.86,16.48 9.4,16.48 11.94,16.48 14.48,16.48 19.56,16.48 22.1,16.48 24.64,16.48 27.18,16.48 29.72,16.48 37.34,16.48 39.88,16.48 42.42,16.48 5.59,19.02 8.13,19.02 10.67,19.02 13.21,19.02 18.29,19.02 25.91,19.02 36.07,19.02 41.15,19.02 46.23,19.02 48.77,19.02 51.31,19.02 58.93,19.02 64.01,19.02 66.55,19.02 69.09,19.02 4.32,21.56 6.86,21.56 9.4,21.56 14.48,21.56 17.02,21.56 19.56,21.56 22.1,21.56 24.64,21.56 27.18,21.56 55.12,21.56 57.66,21.56 65.28,21.56 5.59,24.1 8.13,24.1 13.21,24.1 18.29,24.1 36.07,24.1 51.31,24.1 56.39,24.1 58.93,24.1 64.01,24.1 66.55,24.1 69.09,24.1 1.78,26.64 4.32,26.64 9.4,26.64 11.94,26.64 14.48,26.64 17.02,26.64 19.56,26.64 22.1,26.64 24.64,26.64 32.26,26.64 34.8,26.64 3.05,29.18 8.13,29.18 13.21,29.18 23.37,29.18 30.99,29.18 41.15,29.18 43.69,29.18 46.23,29.18 48.77,29.18 1.78,31.72 6.86,31.72 9.4,31.72 11.94,31.72 17.02,31.72 19.56,31.72 22.1,31.72 24.64,31.72 27.18,31.72 37.34,31.72 39.88,31.72 44.96,31.72 65.28,31.72 3.05,34.26 5.59,34.26 8.13,34.26 10.67,34.26 13.21,34.26 18.29,34.26 23.37,34.26 30.99,34.26 41.15,34.26 46.23,34.26 61.47,34.26 64.01,34.26 1.78,36.8 6.86,36.8 9.4,36.8 11.94,36.8 14.48,36.8 17.02,36.8 22.1,36.8 42.42,36.8 44.96,36.8 62.74,36.8 65.28,36.8 3.05,39.34 18.29,39.34 20.83,39.34 23.37,39.34 25.91,39.34 28.45,39.34 30.99,39.34 46.23,39.34 69.09,39.34 1.78,41.88 4.32,41.88 6.86,41.88 9.4,41.88 11.94,41.88 14.48,41.88 17.02,41.88 19.56,41.88 22.1,41.88 24.64,41.88 27.18,41.88 29.72,41.88 32.26,41.88 52.58,41.88 60.2,41.88 67.82,41.88 3.05,44.42 8.13,44.42 10.67,44.42 13.21,44.42 15.75,44.42 18.29,44.42 20.83,44.42 23.37,44.42 25.91,44.42 28.45,44.42 30.99,44.42 33.53,44.42 43.69,44.42 46.23,44.42 53.85,44.42 56.39,44.42 61.47,44.42 66.55,44.42 69.09,44.42 6.86,46.96 19.56,46.96 22.1,46.96 24.64,46.96 47.5,46.96 50.04,46.96
  other v3: 3,3 3,47 67,47
HSE_IN: C5.2 STM32F103.5 X2.2 | length 17
  Top Layer w0.3: v2(23.145,26.131) 23.7,25.575 STM32F103.5
  Bottom Layer w0.3: X2.2 20.52,31.089 C5.2 20.943,30.816 23.145,28.614 v2(23.145,26.131)
HSE_OUT: C4.2 STM32F103.6 X2.1 | length 21.1
  Top Layer w0.3: v2(21.669,25.889) 22.483,25.075 STM32F103.6
  Bottom Layer w0.3: X2.1 15.44,30.881 C4.2 15.791,30.432 17.126,30.432 v2(21.669,25.889)
INT: CCS811.6 R12.2 STM32F103.40 | length 23.4
  Top Layer w0.254: STM32F103.40 v2(35.955,35.956)
  Bottom Layer w0.254: CCS811.6 32.274,46.936 33.394,46.936 36.902,43.428 38.393,43.428 R12.2 38.631,43.055 36.61,41.034 36.61,36.611 v2(35.955,35.956)
IO0: "ESP8266 12-E.18" P1.5 R15.2 R18.2 | length 33.5
  Top Layer w0.254: P1.5 52.145,4.786 53.729,6.37 55.108,6.37 R18.2 58.121,9.383 58.121,14.854 61.501,18.234 61.501,24.249 60.975,24.775 60.975,26.175 ; 60.975,26.575 60.975,26.175 ; v2(63.351,24.444) 62.706,24.444 60.975,26.175
  Bottom Layer w0.254: v2(63.351,24.444) 63.351,23.018 R15.2
IO2: "ESP8266 12-E.17" R17.2 | length 4.4
  Top Layer w0.254: 58.975,26.575 58.975,26.175 59.916,25.234 v2(59.916,24.372)
  Bottom Layer w0.254: R17.2 59.916,22.57 v2(59.916,24.372)
IO4: "ESP8266 12-E.19" STM32F103.15 | length 41.8
  Top Layer w0.254: STM32F103.15 32.955,17.034 34.314,15.675 42.678,15.675 v2@42.691,15.689 ; v2(45.146,15.712) 45.146,18.705 54.27,27.829 62.121,27.829 62.975,26.975 62.975,26.575
  Bottom Layer w0.254: v2(42.653,15.693) 42.662,15.702 45.137,15.702 v2(45.146,15.712)
IO15: "ESP8266 12-E.16" R23.2 | length 10.9
  Top Layer w0.3: 56.975,26.575 56.975,24.128 v2(57.009,24.094)
  Bottom Layer w0.3: v2@57.004,24.127 57.009,24.122 57.009,16.04 R23.2
IO16: "ESP8266 12-E.4" D4.2 R20.2 | length 12.8
  Top Layer w0.3: D4.2 61.76,4.391 61.138,5.013 59.988,5.013 59.298,5.703 59.298,7.645 59.895,8.242 R20.2 62.975,8.984 62.975,11.575
IRLED: R10.1 STM32F103.13 | length 46.2
  Top Layer w0.254: STM32F103.13 31.955,13.592 33.194,12.353 v2(33.194,10.305)
  Bottom Layer w0.254: v2(33.194,10.305) 35.211,10.305 35.213,10.303 39.509,14.599 39.509,14.608 44.86,19.959 44.86,20.76 54.475,30.375 59.32,30.375 R10.1
LED: R1.2 STM32F103.19 | length 4.2
  Top Layer w0.254: STM32F103.19 34.955,16.528 R1.2
NetBOOT1_2: BOOT1.2 R2.2 | length 3.8
  Bottom Layer w0.254: BOOT1.2 4.44,35.604 R2.2
NetBOOT1_5: BOOT1.5 R3.1 | length 4.5
  Bottom Layer w0.254: R3.1 4.395,28.566 BOOT1.5
NetC14_2: C14.2 F1.2 U2.3 | length 7.8
  Top Layer w0.508: F1.2 14.567,2.225 15.487,3.145 17.909,3.145 C14.2 20.502,3.25 U2.3
NetD1_2: D1.2 R1.1 | length 3.9
  Top Layer w0.254: D1.2 34.831,14.259 R1.1
NetD2_2: D2.2 F1.1 | length 4.5
  Top Layer w0.508: D2.2 10.878,1.518 F1.1
NetD3_1: D3.1 R9.1 | length 4.8
  Top Layer w0.508: R9.1 32.911,1.954 34.905,3.949 36.674,3.949 D3.1@36.75,4.025
NetD4_1: D4.1 R16.1 | length 3.1
  Top Layer w0.254: R16.1 59.757,3.365 D4.1
NetFLASH_1: FLASH.1 R18.1 | length 5.5
  Top Layer w0.254: FLASH.1 50.187,9.019 53.776,9.019 54.767,8.029 R18.1
NetGP1_3: DUST.3 Q1.3 | length 5.3
  Bottom Layer w0.508: Q1.3 64.954,35.954 DUST.3
NetJ1_2: R6.2 USB.2 | length 3.2
  Top Layer w0.203: USB.2 5.096,11.227 6.002,11.227 6.745,11.97 7.886,11.97 R6.2
NetJ1_3: R7.2 USB.3 | length 3.1
  Top Layer w0.203: USB.3 5.099,10.534 6.009,10.534 6.686,9.856 7.745,9.856 R7.2
NetQ1_2: Q1.2 R10.2 | length 2.3
  Bottom Layer w0.3: Q1.2 59.595,32.703 R10.2
NetR20_1: R20.1 R21.1 RESET.1 | length 23.7
  Top Layer w0.254: RESET.1 50.192,18.084 52.028,16.248 v1(52.028,13.928)
  Top Layer w0.3: v1(60.221,6.327) 62.218,6.327 R20.1 R21.1
  Bottom Layer w0.254: v1(52.028,13.928) 52.072,13.885 52.663,13.885 v1(60.221,6.327)
NRST: C1.2 nRST.1 R4.2 STM32F103.7 | length 20.7
  Top Layer w0.3: nRST.1@16.2,17.525 nRST.1 19.239,17.325 v1(19.249,17.315) ; v2(24.728,24.575) STM32F103.7
  Bottom Layer w0.3: v1(19.249,17.315) 21.184,19.249 R4.2 21.379,19.286 C1.2 21.379,24.564 24.717,24.564 v2(24.728,24.575)
OSC32_IN: C2.2 STM32F103.3 X1.1 | length 17.6
  Top Layer w0.254: v2(26.872,26.583) 26.876,26.579 30.521,26.579 STM32F103.3
  Bottom Layer w0.254: v2(26.872,26.583) 26.236,27.219 26.236,32.255 X1.1 32.594,35.982 C2.2
OSC32_OUT: C3.2 STM32F103.4 X1.2 | length 17.9
  Top Layer w0.254: v2(25.488,26.353) 25.522,26.353 25.8,26.075 STM32F103.4
  Bottom Layer w0.254: C3.2 24.813,35.94 25.617,35.136 25.617,26.516 25.488,26.387 v2(25.488,26.353) ; C3.2@24.772,35.94 24.814,35.982 X1.2
PA4: P2.5 STM32F103.14 | length 37.7
  Top Layer w0.254: STM32F103.14 32.455,22.073 36.303,25.921 v2@36.346,25.921 ; v2(39.317,28.634) 42.974,32.291 44.545,32.291 v2@44.549,32.287
  Bottom Layer w0.254: v2(36.308,25.926) 38.991,28.609 39.292,28.609 v2(39.317,28.634) ; v2(44.511,32.291) 47.933,32.291 53.292,37.651 55.28,37.651 55.81,37.121 55.81,32.952 P2.5
PA8: GPIO.1 STM32F103.29 | length 33.2
  Top Layer w0.254: STM32F103.29@38.426,24.075 v2(41.545,24.075) ; v2(49.518,31.538) 49.518,37.721 v2(50.526,38.728)
  Bottom Layer w0.254: v2(41.545,24.075) 45.917,24.075 49.518,27.677 v2(49.518,31.538) ; v2@50.526,38.762 50.56,38.762 51.412,39.615 51.412,46.593 GPIO.1
PB12: GPIO.5 STM32F103.25 | length 39.1
  Top Layer w0.254: STM32F103.25 39.525,22.075 39.969,21.631 v2(43.271,21.631) ; v2(44.925,21.649) 52.233,28.957 52.233,36.314 54.644,38.725 54.945,38.725 v2(54.969,38.75)
  Bottom Layer w0.254: v2(43.271,21.631) 43.28,21.64 44.916,21.64 v2(44.925,21.649) ; v2(54.969,38.75) 62.195,45.976 GPIO.5
PB13: GPIO.4 STM32F103.26 | length 37.6
  Top Layer w0.254: STM32F103.26 40.783,22.575 41.07,22.288 v2(42.878,22.288) ; v2(51.788,31.543) 51.788,36.652 v2(53.85,38.714)
  Bottom Layer w0.254: v2(42.878,22.288) 45.746,22.288 51.788,28.33 v2@51.788,31.5 ; v2(53.85,38.714) 59.655,44.519 GPIO.4
PB14: GPIO.3 STM32F103.27 | length 36
  Top Layer w0.254: STM32F103.27 40.822,23.075 41.053,22.844 v2(42.384,22.844) ; v2(51.177,31.538) 51.177,37.214 v2(52.678,38.715)
  Bottom Layer w0.254: v2(42.384,22.844) 45.763,22.844 51.177,28.258 v2@51.177,31.506 ; v2(52.678,38.715) 57.115,43.152 GPIO.3
PB15: GPIO.2 STM32F103.28 | length 34.4
  Top Layer w0.254: STM32F103.28 41.659,23.575 41.868,23.365 v2(41.903,23.365) ; v2(50.353,31.571) 50.353,37.719 v2(51.399,38.765)
  Bottom Layer w0.254: v2(41.903,23.365) 45.745,23.365 50.353,27.973 v2(50.353,31.571) ; v2@51.399,38.799 51.433,38.799 54.575,41.942 GPIO.2
RESET: "ESP8266 12-E.1" C18.2 P1.2 P2.6 R21.2 R22.2 | length 71.3
  Top Layer w0.3: P1.2 45.552,1.673 61.762,1.673 65.366,5.277 67.943,5.277 67.954,5.266 68.078,5.266 68.44,5.627 68.44,7.951 68.149,8.242 R21.2 68.975,9.754 68.975,11.575 68.975,12.991 v2(67.853,14.113) ; P2.6 56.965,29.437 v1(56.966,29.435)
  Bottom Layer w0.3: v1(56.966,29.435) 56.921,29.435 54.011,26.525 54.011,15.288 55.254,14.046 62.957,14.046 63.709,14.797 C18.2 67.805,15.828 R22.2 67.822,14.144 v2(67.853,14.113)
RST: CCS811.7 R11.2 STM32F103.41 | length 21.8
  Top Layer w0.254: v2(35.4,36.016) 35.4,29.06 STM32F103.41
  Bottom Layer w0.254: CCS811.7 33.242,43.428 34.777,43.428 R11.2 35.285,43.055 36.039,42.301 36.039,39.473 35.455,38.889 35.4,38.834 v2(35.4,36.016)
RX_1: P2.3 STM32F103.31 | length 20.9
  Top Layer w0.254: STM32F103.31 v2(40.468,25.075)
  Bottom Layer w0.254: v2(40.468,25.075) 42.88,25.075 44.686,26.882 44.686,29.709 46.504,31.526 47.794,31.526 49.423,33.155 53.473,33.155 P2.3
RXD0: "ESP8266 12-E.21" P1.3 P2.2 | length 54.6
  Top Layer w0.254: v1(53.833,28.882) 65.068,28.882 ; P2.2 61.35,32.262 61.688,32.262 65.068,28.882 ; 66.975,26.575 66.975,26.975 65.068,28.882
  Bottom Layer w0.254: P1.3 47.065,22.114 v1(53.833,28.882)
SCL_1: CCS811.3 R13.2 Si1.4 STM32F103.42 | length 60.6
  Top Layer w0.254: Si1.4 10.136,46.965 12.029,48.858 12.024,48.862 16.326,48.862 v2(16.37,48.818) ; STM32F103.42 34.955,36.301 37.068,38.413 v2@41.526,38.413
  Bottom Layer w0.254: v2(16.37,48.818) 38.012,48.818 CCS811.3 39.984,46.947 43.504,43.428 45.625,43.428 R13.2 45.998,42.796 v2(41.586,38.383)
SDA_1: CCS811.4 R14.2 Si1.3 STM32F103.43 | length 51.3
  Top Layer w0.254: Si1.3 13.779,48.376 v2(15.83,48.376) ; STM32F103.43 34.468,29.018 34.468,35.139 v2(34.482,35.153)
  Bottom Layer w0.254: v2(15.83,48.376) 15.832,48.374 16.554,48.374 16.557,48.376 35.914,48.376 CCS811.4 37.462,46.828 38.474,46.828 R14.2@42.247,43.055 ; v2(34.482,35.153) 36.599,35.153 40.042,38.596 40.042,39.524 40.036,39.53 40.036,40.844 R14.2@42.247,43.055 ; R14.2 R14.2@42.247,43.055
SWCLK: STM32F103.37 SWD1.3 | length 38.4
  Top Layer w0.254: SWD1.3 8.667,28.306 29.121,28.306 29.457,27.971 37.159,27.971 37.442,28.254 37.442,28.992 STM32F103.37
SWDIO: STM32F103.34 SWD1.2 | length 39.2
  Top Layer w0.254: SWD1.2 29.412,19.685 31.94,22.213 31.94,22.252 36.263,26.575 STM32F103.34
TX_1: P2.1 STM32F103.30 | length 25.3
  Top Layer w0.254: STM32F103.30 38.886,24.574 v2(41.154,24.574)
  Bottom Layer w0.254: v2(41.154,24.574) 42.918,24.574 45.067,26.724 45.067,29.551 46.607,31.091 48.009,31.091 49.506,32.588 53.992,32.588 ; 53.993,32.588 54.326,32.588 55.429,33.691 55.429,35.643 P2.1
TXD0: "ESP8266 12-E.22" P1.4 P2.4 | length 61.3
  Top Layer w0.254: v1(55.818,29.522) 55.834,29.538 55.834,32.976 P2.4 55.961,35.111 55.961,37.063 56.698,37.799 67.069,37.799 68.997,35.871 68.997,26.597 68.975,26.575
  Bottom Layer w0.254: P1.4 49.605,23.383 55.745,29.522 v1(55.818,29.522)
V-LED: C13.1 DUST.1 R8.2 | length 33.6
  Bottom Layer w0.254: C13.1@47.452,34.976 47.452,37.394 48.215,38.156 60.584,38.156 R8.2 63.907,37.992 67.272,37.992 68.012,37.252 68.012,30.535 DUST.1
VCC: D2.1 DUST.6 R8.1 SWD1.1 USB.1 | length 121.1
  Top Layer w0.381: USB.1 5.086,11.848 5.94,11.848 6.832,12.74
  Top Layer w0.508: 6.832,12.74 v1(6.832,14.461) 4.149,17.145 SWD1.1 0.724,19.006 0.724,39.746 10.367,49.39 16.642,49.39 17.167,48.865 62.146,48.865 64.01,47.001 64.01,44.518 DUST.6 ; D2.1 7.607,5.692 v1(7.607,7.75)
  Bottom Layer w0.508: v1(6.832,14.461) 7.607,13.687 v1(7.607,7.75) ; R8.1 66.545,41.768 DUST.6
WAK: CCS811.5 STM32F103.39 | length 22.3
  Top Layer w0.254: 36.447,35.415 v2@36.447,35.531 ; v2(36.451,35.634) 36.451,29.009 STM32F103.39
  Bottom Layer w0.254: CCS811.5 36.566,45.184 38.131,45.184 39.655,43.66 39.655,39.372 39.661,39.367 39.661,38.992 38.155,37.486 36.451,35.784 v2(36.451,35.634)
pads on no net: "ESP8266 12-E.2" "ESP8266 12-E.5" "ESP8266 12-E.6" "ESP8266 12-E.7" "ESP8266 12-E.9" "ESP8266 12-E.10" "ESP8266 12-E.11" "ESP8266 12-E.12" "ESP8266 12-E.13" "ESP8266 12-E.14" "ESP8266 12-E.20" STM32F103.2 STM32F103.10 STM32F103.11 STM32F103.16 STM32F103.17 STM32F103.18 STM32F103.21 STM32F103.22 STM32F103.38 STM32F103.45 STM32F103.46 USB.4
copper on no net: | length 0.6
  Top Layer w0.254: 33.455,20.645 33.468,20.632 ; 33.955,20.645 33.968,20.632 ; 53.175,16.075 53.475,16.075 ; 53.175,22.075 53.475,22.075
  other v3: 67,3

## Polygon pours and split planes (outlines as drawn)
GND on Top Layer "GND" (solid, remove dead copper, pour order 20): 0,0 69.998,0 70,0.001 70,50 0.001,50 0,49.999
no net on Top Layer "Top Layer-No Net" (solid, pour order 14): -9.294,30.163
GND on Bottom Layer "GND" (solid, remove dead copper, pour order 22): 0,49.999 0,0 70,0 70,0.001 70,50 0.001,50
GND on Bottom Layer "GND" (solid, remove dead copper, pour order 24): 4.148,54.554

## Keep-outs
Keep-Out Layer:
  lines w0.127: 0,50 0,49.999 0,0 ; 0,50 0,50 ; 0,50 70,50 70,0.001 70,0 ; 0,50 0,0 70,0 ; 0,50 70,50 70,0 ; 0,0 0,0 ; 0,0 70,0 ; 70,0 70,0

## Silkscreen, mask and mechanical layers (free items; w line width, h text height)
Top Overlay:
  text "PA8" at 52.517,43.726 h0.76 r90
  text "INT" at 33.028,43.504 h0.76 r90
  text "SCL" at 40.778,43.468 h0.76 r90
  text "3.3" at 45.275,43.468 h0.76 r90
  text "SDA" at 38.256,43.431 h0.76 r90
  text "GND" at 43.008,43.431 h0.76 r90
  text "RST" at 30.067,43.395 h0.76 r90
  text "ADD" at 27.362,43.358 h0.76 r90
  text "WAK" at 35.697,43.358 h0.76 r90
  text "3.3" at 15.137,43.188 h0.76 r90
  text "GND" at 18.088,43.188 h0.76 r90
  text "SCL" at 9.692,43.169 h0.76 r90
  text "PB14" at 57.43,43.153 h0.76 r90
  text "PB12" at 62.712,43.153 h0.76 r90
  text "PB15" at 55.014,43.112 h0.76 r90
  text "PB13" at 60.214,43.112 h0.76 r90
  text "SDA" at 12.387,43.088 h0.76 r90
  text "VCC" at 63.121,41.515 h0.76
  text "V0" at 63.817,38.895 h0.76
  text "S-GND" at 61.729,36.233 h0.76
  text "LED" at 63.244,33.818 h0.76
  text "L-GND" at 61.688,31.156 h0.76
  text "V-LED" at 61.77,28.659 h0.76
  text "GND" at 4.084,24.532 h0.76
  text "SWCLK" at 3.985,21.989 h0.76
  text "SWDIO" at 4.005,19.366 h0.76
  text "VCC" at 4.024,16.902 h0.76
  text "GND" at 42.351,3.582 h0.76 r90
  text "IO0" at 52.419,3.582 h0.76 r90
  text "RESET" at 44.929,3.552 h0.76 r90
  text "RXD0" at 47.323,3.552 h0.76 r90
  text "TXD0" at 49.994,3.521 h0.76 r90
Bottom Overlay:
  text "hppzbr" at 35,1 h2

## Text inside footprints (layer, text, board x,y; h text height)
BOOT1: Top Overlay "1" at 6.966,30.385 h1.02; Top Overlay "0" at 2.137,31.451 h1.02 r180
P2: Top Overlay "TX" at 51.118,35.938 h1.02; Top Overlay "RX" at 51.024,33.371 h1.02; Top Overlay "WAK" at 50.178,30.771 h1.02
USB: Mechanical 13 "PCB EDGE" at 0.751,6.057 h0.81 r270